# Altium PCB PCB_HVKQ_Mr_Thang.PcbDoc
Units mil, origin at the board's own origin, x right, y up, seen from the top; angles counter-clockwise.
Board outline 4724.94 x 6895.64 mil, 2 copper layers (Top Layer, Bottom Layer); 87 components, 142 nets, 425 pads, 0 vias.
Unrouted connection lines stored in the file: 192.
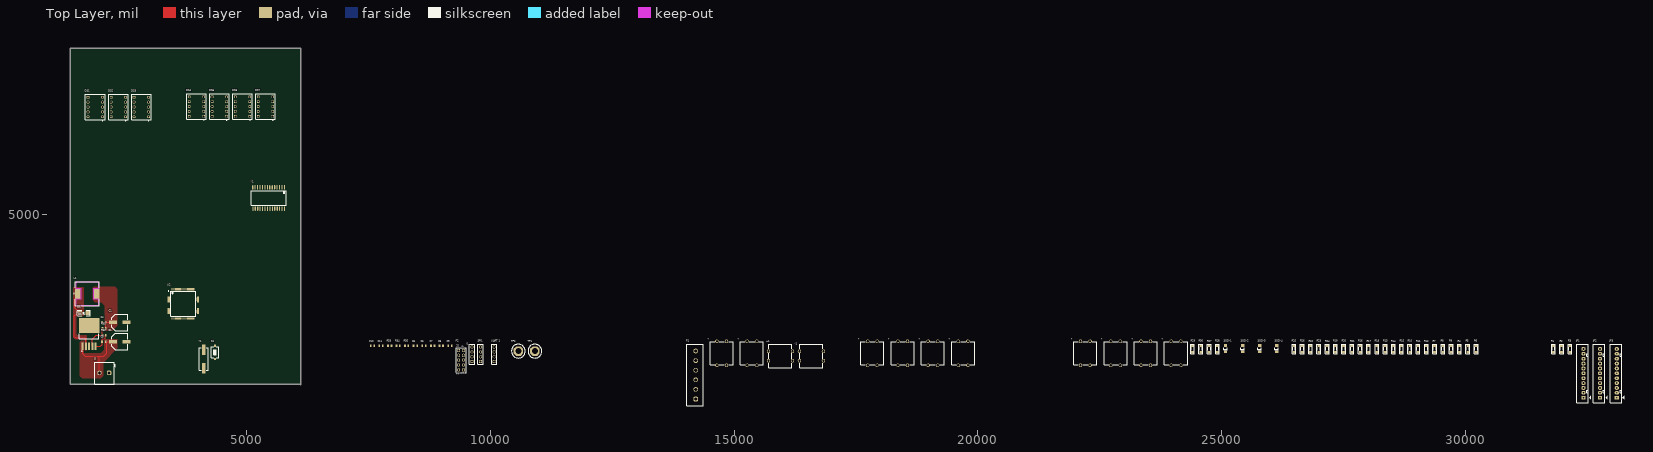
[diagram p0: Top Layer view]
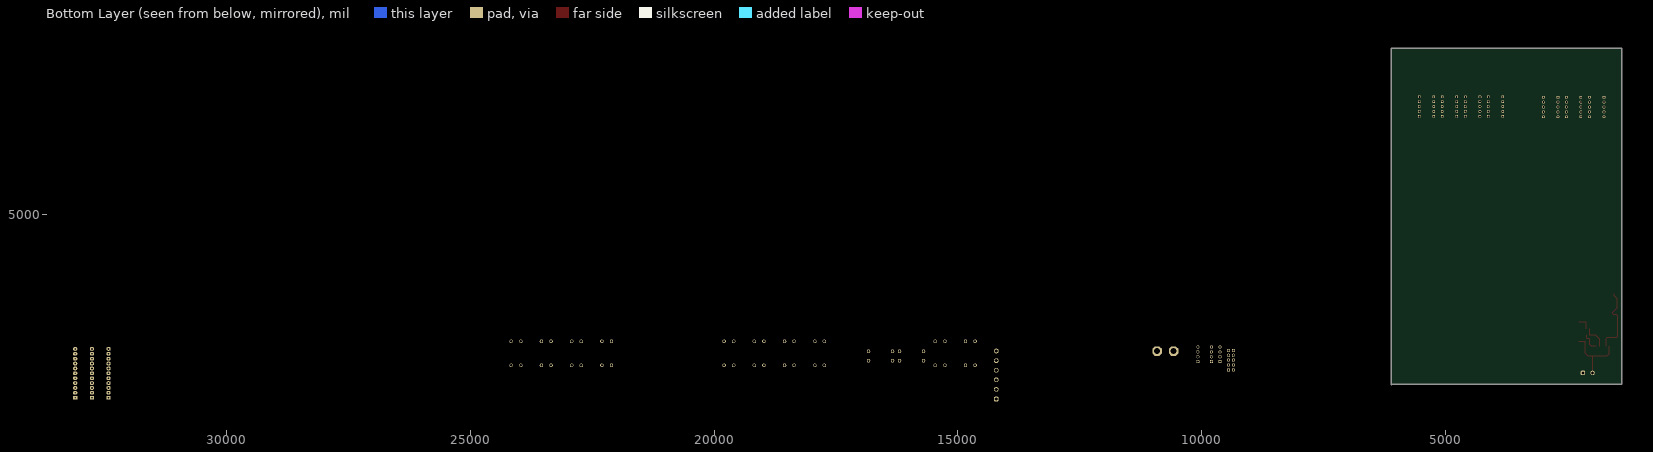
[diagram p1: Bottom Layer view, seen from below]

## Layer stack, top to bottom
Top Solder: solder mask 0.4, Solder Resist, Dk 3.5
Top Layer: signal copper 1.4
Dielectric 1: dielectric 12.6, FR-4, Dk 4.8
Bottom Layer: signal copper 1.4
Bottom Solder: solder mask 0.4, Solder Resist, Dk 3.5

## Board outline
1387.41,1515.08 1387.15,8405.11 6111.82,8405.37 6112.09,1515.36 6112.09,1510 cw(c6111.82,1510) 6111.56,1510 6111.56,1515.08

## Design rules (kind name [scope] priority, off if disabled: settings)
Clearance [All] p1: gap=10 ignorepadtopadclearanceinfootprint=FALSE except(0: Arc-Hole Track-Hole SMDPad-Hole THPad-Hole Via-Hole Fill-Hole Poly-Hole Region-Hole Text-Hole)
PlaneConnect [All] p1: planeconnectstyle=Direct reliefexpansion=20 reliefentries=4 reliefconductorwidth=10 reliefairgap=10
PolygonConnect [All] p1: connectstyle=Direct reliefconductorwidth=10 reliefentries=4 polygonreliefangle="90 Angle" airgapwidth=10
RoutingVias [All] p1: holewidth=28 width=50 viastyle="Through Hole" minholewidth=12 minwidth=24 maxholewidth=12 maxwidth=24
SolderMaskExpansion [All] p1: expansion=4 istentingtop=FALSE
Width [All] p1: maxlimit=50 minlimit=20 preferedwidth=30
29 further rules are at their usual default settings.

## Classes and differential pairs
component class SCH_HVKQ_Mr_THANG: *1 +1 -1 ? C1 C4 C5 C6 C7 C8 C9 C10 C11 D1 DS1 DS2 DS3 DS4 DS5 DS6 DS7 I1 J1 JP1 JP2 JP3 L1 P1 P2 R1 R2 R3 R4 R5 R6 R7 R8 R9 R10 R11 R12 R13 R14 R15 R16 R17 R18 R19 R20 R21 R22 R23 R24 R25 R26 R27 R28 R29 R30 R31 R32 R33 R34 R35 S1 SOD-1 SOD-2 SOD-3 SOD-4 SPI1 TP1 TP2 U1 U2 "UART 1" Y1

## Components (designator, comment, footprint, x,y, rotation, side; value= is the part's Value field where it differs from the comment)
*1 "TM1638" SOIC28 5455,5335 r270 top
+1 "430456073736" 4304x60737x6 15950,2095 r0 top
-1 "430456073736" 4304x60737x6 16585,2095 r0 top
? "430456073736" 4304x60737x6 19075,2150 r90 top
? "430456073736" 4304x60737x6 24060,2150 r90 top
? "430456073736" 4304x60737x6 17835,2150 r90 top
? "430456073736" 4304x60737x6 19695,2150 r90 top
? "430456073736" 4304x60737x6 23440,2150 r90 top
? "430456073736" 4304x60737x6 18455,2150 r90 top
? "430456073736" 4304x60737x6 15365,2150 r90 top
? "430456073736" 4304x60737x6 22820,2150 r90 top
? "430456073736" 4304x60737x6 22200,2150 r90 top
? "430456073736" 4304x60737x6 14745,2150 r90 top
C1 "6.8uF, 100V" WCAP-PSHP_D8H8.7 2402.8,2390 r180 top
C2 "6.8uF, 100V" WCAP-PSHP_D8H8.7 2402.8,2785 r180 top
C3 "10uF, 6.3V" WCAP-CSGP_0805_L2W1.25H1.25 2077.05,2390 r0 top
C4 "10uF, 6.3V" WCAP-CSGP_0805_L2W1.25H1.25 2077.05,2790 r0 top
C5 "10uF, 6.3V" WCAP-CSGP_0805_L2W1.25H1.25 8465,2305 r0 top
C6 "10uF, 6.3V" WCAP-CSGP_0805_L2W1.25H1.25 8640,2305 r0 top
C7 "10uF, 6.3V" WCAP-CSGP_0805_L2W1.25H1.25 8820,2305 r0 top
C8 "10uF, 6.3V" WCAP-CSGP_0805_L2W1.25H1.25 8995,2305 r0 top
C9 "10uF, 6.3V" WCAP-CSGP_0805_L2W1.25H1.25 9175,2305 r0 top
C10 "10uF, 6.3V" WCAP-CSGP_0805_L2W1.25H1.25 7585,2305 r0 top
C11 "10uF, 6.3V" WCAP-CSGP_0805_L2W1.25H1.25 7760,2305 r0 top
D1 "SS34" DIO-SMD-106 1665,2980 r0 top value=1N5007
DS1 "157119S12701" WL-T7DS_L13W10H7 1900,7200 r0 top
DS2 "157119S12701" WL-T7DS_L13W10H7 2375,7200 r0 top
DS3 "157119S12701" WL-T7DS_L13W10H7 2845,7200 r0 top
DS4 "157119S12701" WL-T7DS_L13W10H7 3975,7210 r0 top
DS5 "157119S12701" WL-T7DS_L13W10H7 4445,7210 r0 top
DS6 "157119S12701" WL-T7DS_L13W10H7 4920,7210 r0 top
DS7 "157119S12701" WL-T7DS_L13W10H7 5390,7210 r0 top
I1 "61300411121" 61300411121 9625,2130 r90 top
J1 "691236510002" 691236510002 2085,1742.46 r180 top
JP1 "JP11" Header11 32415,1240 r90 top value="Connector 11"
JP2 "JP11" Header11 32755,1240 r90 top value="Connector 11"
JP3 "JP11" Header11 33100,1240 r90 top value="Connector 11"
L1 "470µH, 0.97A" "WE-PD HV_1210" 1735.12,3375 r270 top
P1 "691311700106" 691311700106 14195,1705 r90 top
P2 "61301021121" 61301021121 9400,2010 r90 top
R1 "2k2" RES-SMD-1206 31800,2240 r90 top
R2 "2k2" RES-SMD-1206 31970,2240 r90 top
R3 "2k2" RES-SMD-1206 32140,2240 r90 top
R4 "2k2" RES-SMD-1206 29875,2240 r90 top
R5 "2k2" RES-SMD-1206 30045,2240 r90 top
R6 "2k2" RES-SMD-1206 30215,2240 r90 top
R7 "2k2" RES-SMD-1206 29365,2240 r90 top
R8 "2k2" RES-SMD-1206 29535,2240 r90 top
R9 "2k2" RES-SMD-1206 29705,2240 r90 top
R10 "2k2" RES-SMD-1206 28855,2240 r90 top
R11 "2k2" RES-SMD-1206 29025,2240 r90 top
R12 "2k2" RES-SMD-1206 29195,2240 r90 top
R13 "2k2" RES-SMD-1206 28350,2240 r90 top
R14 "2k2" RES-SMD-1206 28520,2240 r90 top
R15 "2k2" RES-SMD-1206 28685,2240 r90 top
R16 "2k2" RES-SMD-1206 27840,2240 r90 top
R17 "2k2" RES-SMD-1206 28010,2240 r90 top
R18 "2k2" RES-SMD-1206 28180,2240 r90 top
R19 "2k2" RES-SMD-1206 27330,2240 r90 top
R20 "2k2" RES-SMD-1206 27500,2240 r90 top
R21 "2k2" RES-SMD-1206 27670,2240 r90 top
R22 "2k2" RES-SMD-1206 26820,2240 r90 top
R23 "2k2" RES-SMD-1206 26990,2240 r90 top
R24 "2k2" RES-SMD-1206 27160,2240 r90 top
R25 "2k2" RES-SMD-1206 26480,2240 r90 top
R26 "2k2" RES-SMD-1206 26650,2240 r90 top
R27 "2k2" RES-SMD-1206 24740,2240 r90 top
R28 "2k2" RES-SMD-1206 24910,2240 r90 top
R29 "2k2" RES-SMD-1206 24400,2240 r90 top
R30 "2k2" RES-SMD-1206 24570,2240 r90 top
R31 "ADJ" WRIS-PSMB_0805_H0.35 2080,2657.85 r0 top
R32 "ADJ" WRIS-PSMB_0805_H0.35 2080,2524.51 r180 top
R33 "10k" WRIS-PSMB_0805_H0.35 7940,2305 r0 top
R34 "10k" WRIS-PSMB_0805_H0.35 8110,2305 r0 top
R35 "10k" WRIS-PSMB_0805_H0.35 8285,2305 r0 top
S1 "SW-SMD" SW-SMD 4355,2170 r90 top
SOD-1 "D" SOD-80 25075,2245 r90 top
SOD-2 "D" SOD-80 25425,2245 r90 top
SOD-3 "D" SOD-80 25775,2245 r90 top
SOD-4 "D" SOD-80 26125,2245 r90 top
SPI1 "61300411121" 61300411121 9800,2130 r90 top
TP1 "TP" TP 10915,2195 r0 top
TP2 "TP" TP 10575,2195 r0 top
U1 "LM2596" LM2596 1775,2548.37 r90 top
U2 "ATmega2560-AU" TQFP100L 3705,3165 r0 top
"UART 1" "61300411121" 61300411121 10080,2130 r90 top
Y1 "16MHz" WE-XTAL_HC49/4HSMX 4125,2035 r90 top

## Footprints (in the part's own frame and the unit in brackets; to place one, negate y for a bottom-side part, rotate by r counter-clockwise, add the part's x,y. Pads: shape width x height; smd on the part's side, far side on the other; paste and mask are expansions set on the pad)
4304x60737x6 [mm] "12x12mm washable Tact Switch, THT version"
  round 1.8 hole 1.2: 1(-6.25,2.5) 2(6.25,2.5) 3(-6.25,-2.5) 4(6.25,-2.5)
  silkscreen extent -6,-6 6,6, body extent -6.99,-6 6.99,6, height 7.35
61300411121 [mm] "Pin Header, pitch 2.54 mm, THT, Vertical, single row, 4p"
  rrect50% 1.6x1.6 hole 1.1: 1(-3.81,0)
  round 1.6 hole 1.1: 2(-1.27,0) 3(1.27,0) 4(3.81,0)
  silkscreen extent -5.23,-1.35 5.23,1.35, body extent -5.08,-1.27 5.08,1.27, height 8.57
61301021121 [mm] "Pin Header, pitch 2.54 mm, THT, Vertical, dual row, 10p"
  rrect50% 1.65x1.65 hole 1.1: 1(-5.08,-1.27)
  round 1.65 hole 1.1: 2(-5.08,1.27) 3(-2.54,-1.27) 4(-2.54,1.27) 5(0,-1.27) 6(0,1.27) 7(2.54,-1.27) 8(2.54,1.27) 9(5.08,-1.27) 10(5.08,1.27)
  silkscreen extent -6.5,-2.62 6.5,2.62, body extent -6.35,-2.54 6.35,2.54, height 8.59
691236510002 [mm] "Horizontal Cable Entry with Rising Cage Clamp, pitch 5.08mm, 02p"
  rrect50% 2.25x2.25 hole 1.5: 1(-2.54,-0.175)
  round 2.25 hole 1.5: 2(2.54,-0.175)
  silkscreen extent -5.68,-5.68 5.08,5.68, body extent -5.68,-5.67 5.08,5.68, height 18.1
691311700106 [mm] "5.00mm - PCB Vertical Closed - 06p"
  rrect50% 2.4x2.4 hole 1.6: 1(-12.5,-0.45)
  round 2.4 hole 1.6: 2(-7.5,-0.45) 3(-2.5,-0.45) 4(2.5,-0.45) 5(7.5,-0.45) 6(12.5,-0.45)
  silkscreen extent -16,-4.25 16,4.25, body extent -16,-4.25 16,4.25, height 12.1
DIO-SMD-106 [mil]
  rect 90x90.55 smd: 1(80,0) 2(-80,0)
  silkscreen extent -130,-55 135,55, body extent -99,-50 106,52, height 95
Header11 [mil] "CON11"
  rect 75x90 hole 34: 1(0,0)
  oval 75x90 hole 34: 2(100,0) 3(200,0) 4(300,0) 5(400,0) 6(500,0) 7(600,0) 8(700,0) 9(800,0) 10(900,0) 11(1000,0)
  silkscreen extent -100,-150 1100,140
LM2596 [mm] "Power"
  rect 3.79x0.99 smd: 1(-6.4,3.4) 2(-6.4,1.7) 3(-6.4,0) 4(-6.4,-1.7) 5(-6.4,-3.4)
  rect 7.88x10.84 smd paste-6: 6(4.35,0)
  silkscreen extent -9.1,-5.08 0.09,5.08, body extent -7.7,-5.21 6.69,5.2, height 0.15
RES-SMD-1206 [mil]
  rect 50x65 smd: 1(-65,0) 2(65,0)
  silkscreen extent -99,-38 99,39, body extent -63,-31 63,32, height 40
SOD-80 [mm] "SOD-80"
  rect 1.35x1.8 smd: 1(1.675,0) 2(-1.675,0)
  silkscreen extent -0.6,-0.9 0.6,0.9, body extent -1.75,-0.76 1.75,0.74, height 1.45
SOIC28 [mm]
  oval 2.25x0.6 smd: 1(-5.55,8.225) 2(-5.55,6.955) 3(-5.55,5.685) 4(-5.55,4.415) 5(-5.55,3.145) 6(-5.55,1.875) 7(-5.55,0.605) 8(-5.55,-0.665) 9(-5.55,-1.935) 10(-5.55,-3.205) 11(-5.55,-4.475) 12(-5.55,-5.745) 13(-5.55,-7.015) 14(-5.55,-8.285) 15(5.55,-8.225) 16(5.55,-6.955) 17(5.55,-5.685) 18(5.55,-4.415) 19(5.55,-3.145) 20(5.55,-1.875) 21(5.55,-0.605) 22(5.55,0.665) 23(5.55,1.935) 24(5.55,3.205) 25(5.55,4.475) 26(5.55,5.745) 27(5.55,7.015) 28(5.55,8.285)
  silkscreen extent -3.85,-9.1 3.85,9.1, body extent -5.08,-9.05 5.08,9.03, height 2
SW-SMD [mm] "Switch SMD type"
  rect 1.2x0.8 smd: 1(-3.5,0) 2(3.5,0)
  silkscreen extent -2.82,-1.85 2.82,1.85, body extent -3.05,-1.85 3.05,1.85, height 2.5
TP [mm] "TestPoint"
  oct 5x5 hole 3.1: 1(0,0)
  silkscreen extent -3.58,-3.59 3.59,3.59
TQFP100L [mm] "TQFP, 100-Leads, Body 14.00x14.00mm, Pitch 0.50mm, IPC High Density"
  oval 1.2x0.25 smd: 1(-7.6,6) 2(-7.6,5.5) 3(-7.6,5) 4(-7.6,4.5) 5(-7.6,4) 6(-7.6,3.5) 7(-7.6,3) 8(-7.6,2.5) 9(-7.6,2) 10(-7.6,1.5) 11(-7.6,1) 12(-7.6,0.5) 13(-7.6,0) 14(-7.6,-0.5) 15(-7.6,-1) 16(-7.6,-1.5) 17(-7.6,-2) 18(-7.6,-2.5) 19(-7.6,-3) 20(-7.6,-3.5) 21(-7.6,-4) 22(-7.6,-4.5) 23(-7.6,-5) 24(-7.6,-5.5) 25(-7.6,-6) 51(7.6,-6) 52(7.6,-5.5) 53(7.6,-5) 54(7.6,-4.5) 55(7.6,-4) 56(7.6,-3.5) 57(7.6,-3) 58(7.6,-2.5) 59(7.6,-2) 60(7.6,-1.5) 61(7.6,-1) 62(7.6,-0.5) 63(7.6,0) 64(7.6,0.5) 65(7.6,1) 66(7.6,1.5) 67(7.6,2) 68(7.6,2.5) 69(7.6,3) 70(7.6,3.5) 71(7.6,4) 72(7.6,4.5) 73(7.6,5) 74(7.6,5.5) 75(7.6,6)
  oval 0.25x1.2 smd: 26(-6,-7.6) 27(-5.5,-7.6) 28(-5,-7.6) 29(-4.5,-7.6) 30(-4,-7.6) 31(-3.5,-7.6) 32(-3,-7.6) 33(-2.5,-7.6) 34(-2,-7.6) 35(-1.5,-7.6) 36(-1,-7.6) 37(-0.5,-7.6) 38(0,-7.6) 39(0.5,-7.6) 40(1,-7.6) 41(1.5,-7.6) 42(2,-7.6) 43(2.5,-7.6) 44(3,-7.6) 45(3.5,-7.6) 46(4,-7.6) 47(4.5,-7.6) 48(5,-7.6) 49(5.5,-7.6) 50(6,-7.6) 76(6,7.6) 77(5.5,7.6) 78(5,7.6) 79(4.5,7.6) 80(4,7.6) 81(3.5,7.6) 82(3,7.6) 83(2.5,7.6) 84(2,7.6) 85(1.5,7.6) 86(1,7.6) 87(0.5,7.6) 88(0,7.6) 89(-0.5,7.6) 90(-1,7.6) 91(-1.5,7.6) 92(-2,7.6) 93(-2.5,7.6) 94(-3,7.6) 95(-3.5,7.6) 96(-4,7.6) 97(-4.5,7.6) 98(-5,7.6) 99(-5.5,7.6) 100(-6,7.6)
  silkscreen extent -7.72,-6.6 6.6,6.8, body extent -8,-8 8,8, height 1.2
WCAP-CSGP_0805_L2W1.25H1.25 [mm] "Ceramic Capacitors, body 2x1.25mm"
  rect 0.9x1.3 smd: 1(-0.95,0) 2(0.95,0)
  body extent -1,-0.63 1,0.63, height 1.25
WCAP-PSHP_D8H8.7 [mm] "Aluminium Polymer V-Chip SMT Capacitors, D8mm x L8.7mm"
  rect 4.2x1.9 smd: 1(3.5,0) 2(-3.5,0)
  silkscreen extent -4.25,-4.25 4.25,4.25, body extent -4.5,-4.15 4.5,4.15, height 8.7
"WE-PD HV_1210" [mm] "SMT High Voltage Power Inductor, 2-Leads, body 12.00x12.00mm"
  rect 5.4x2.9 smd: 1(0,-4.95) 2(0,4.95)
  Top Layer keep-out region: -6,6 -6,-6 -2.9,-6 -2.9,-3.3 2.9,-3.3 2.9,-6 6,-6 6,6 2.9,6 2.9,3.3 -2.9,3.3 -2.9,6
  silkscreen extent -6.25,-7.02 6.25,6.25, body extent -6,-6 6,6, height 9.7
WE-XTAL_HC49/4HSMX [mm] "Quartz Crystal, size HC49/4HSMX, body 11.4x4.9mm"
  rect 5.5x2 smd: 1(-4.75,0) 2(4.75,0)
  silkscreen extent -5.8,-2.45 5.8,2.45, body extent -6.7,-2.45 6.7,2.45, height 4.3
WL-T7DS_L13W10H7 [mm] "7 Segments Display THT Single Digit , body 10x13mm"
  rrect50% 1.5x1.5 hole 1: 1(-3.76,5.08)
  round 1.5 hole 1: 2(-3.76,2.54) 3(-3.76,0) 4(-3.76,-2.54) 5(-3.76,-5.08) 6(3.76,-5.08) 7(3.76,-2.54) 8(3.76,0) 9(3.76,2.54) 10(3.76,5.08)
  silkscreen extent -5.12,-7.22 5.13,6.63, body extent -5,-6.5 5,6.5, height 7.1
WRIS-PSMB_0805_H0.35 [mm] "Metal Plate Resistor, SMT, body size 2x1.25mm"
  rect 0.95x1.36 smd: 1(-0.875,0) 2(0.875,0)
  body extent -1,-0.62 1,0.63, height 0.35

## Part data
+1 -1 ? ? ? ? ? ? ? ? ? ?: "WS-TATV THT Washable Tact Switch 12x12mm, height 7.3mm, 360gf", Operating Temperature="-40 to +85degC", Rated Current=50mA, Rated Voltage=12VDC, ComponentLink1Description=Manufacturer, ComponentLink1URL=http://www.we-online.de, ComponentLink2Description=Datasheet, ComponentLink2URL=https://katalog.we-online.com/em/datasheet/430456073736.pdf, Contact Material="Stainless Steel", Contact Plating=Silver, Height=7.3mm, Mounting Technology=THT, Operation Force=360gf, Packaging=Bulk, Part Number=430456073736, Published Date="September 2019", Publisher="Wurth Elektronik", Terminal Material="Copper Alloy", Terminal Plating=Silver, Washable=Yes
C1 C2: library part 875115952001, "WCAP-PSHP Aluminum Polymer Capacitor, V-Chip, SMT, D8xH8.7mm, 6.8uF, 100V", Capacitance=6.8uF, Capacitance Tolerance=+/-20%, Leakage Current=136uA, Manufacturer="Wurth Elektronik", Operating Temperature="-55 to +105degC", Rated Voltage=100VDC, Ripple Current=1500mA, ComponentLink1Description=Manufacturer, ComponentLink1URL=http://www.we-online.de, ComponentLink2Description=Datasheet, ComponentLink2URL=https://www.we-online.com/catalog/datasheet/875115952001.pdf, Diameter=8mm, Dissipation Factor=12%, Endurance=2000h, ESR=48mOhm, Height=8.7mm, Manufacturer Part Number=875115952001, Mounting Technology=SMT, Packaging="Tape and Reel", Published Date="October 2020", Technical Reference=PSEE0876R8M100DVCTEB000
C3 C4 C5 C6 C7 C8 C9 C10 C11: library part 885012107004, "WCAP-CSGP Multilayer Ceramic Chip Capacitor, General Purpose, size 0805, X5R, 10uF, 6.3V", Capacitance=10uF, Capacitance Tolerance=+/-20%, Isolation Resistance=0.01GOhm, Manufacturer="Wurth Elektronik", Operating Temperature max.=85C, Operating Temperature min.=-55C, Rated Voltage=6.3V, Ceramic Type=X5R, ComponentLink1Description="Manufacturer Link", ComponentLink1URL=http://www.we-online.de, ComponentLink2Description=Datasheet, ComponentLink2URL=https://www.we-online.com/catalog/datasheet/885012107004.pdf, Dissipation Factor=15%, Height=1.25mm, Length=2mm, Manufacturer Part Number=885012107004, Mounting Technology=SMT, Packaging="Tape and Reel", Size=0805, Technical Reference=X5R0805106M6R3DFCT10000, Width=1.25mm
D1: library part "Diode SMD", "Default Diode", Code - JEDEC=DO-214-AB, Published=8-Jun-2000, Publisher="Altium Limited", Revision="July-2002: Re-released for DXP Platform."
DS1 DS2 DS3 DS4 DS5 DS6 DS7: "WL-T7DS 7 Segments Display THT Single Digit, Common Cathode, 0.39\"/ 9.9mm, 38mcd, 2V, Super Red", Emitting Color="Super Red", Forward Voltage=2V, Manufacturer="Wurth Elektronik", Operating Temperature max.=85C, Operating Temperature min.=-40C, Circuitry="Common Cathode", ComponentLink1Description="Manufacturer Link", ComponentLink1URL=http://www.we-online.de, ComponentLink2Description=Datasheet, ComponentLink2URL=https://www.we-online.com/catalog/datasheet/157119S12701.pdf, Display Height="0.39\"/ 9.9mm", Height=7mm, Length=13mm, Luminous Intensity=38mcd, Manufacturer Part Number=157119S12701, Mounting Technology=THT, Packaging=Tube, Width=10mm
I1 SPI1 "UART 1": "WR-PHD Pin Header, THT, pitch 2.54mm, Single Row, Vertical, 4p", Contact Resistance=20mOhm, Manufacturer="Wurth Elektronik", Operating Temperature="-40 to +105degC", Rated Current=3A, Withstanding Voltage=500VAC, Working Voltage=250VAC, ComponentLink1Description=Manufacturer, ComponentLink1URL=http://www.we-online.de, ComponentLink2Description=Datasheet, ComponentLink2URL=https://www.we-online.com/catalog/datasheet/61300411121.pdf, Gender="Pin Header", Manufacturer Part Number=61300411121, Mounting Technology=THT, Orientation=Vertical, Packaging=Bag, Pin Number=4, Pitch=2.54mm, Row Number=Single
J1: "WR-TBL Serie 2365 Horizontal Entry, Rising Cage Clamp, THT, pitch 5.08mm, 2p", Manufacturer="Wurth Elektronik", Operating Temperature="-30 to +120degC", Rated Current [UL]=20A, Working Voltage [UL]=300VAC, Application="Rising Cage Clamp", ComponentLink1Description=Manufacturer, ComponentLink1URL=http://www.we-online.de, ComponentLink2Description=Datasheet, ComponentLink2URL=https://katalog.we-online.de/em/datasheet/691236510002.pdf, Manufacturer Part Number=691236510002, Modularity=Yes, Mounting Technology=THT, Packaging=Box, PCB/Cable/Panel=PCB, Pin Number=2, Pitch=5.08mm, Published Date="Feburary 2021", Type=Horizontal
JP1 JP2 JP3: library part Header11, "Connector 11"
L1: library part 7687709471, "WE-PD HV SMT High Voltage Power Inductor, size 1210, 470µH, 0.97A, 0.8Ω", Case/Size Code=1210, DC Resistance=0.68Ω, DC Resistance Max=0.8Ω, Inductance=470µH, Manufacturer="Wurth Elektronik", Operating Temperature Max=125°C, Operating Temperature Min=-40°C, Operating Voltage (DC)=400V, Rated Current=0.97A, Saturation Current=1.4A, Self Resonant Frequency=1.9MHz, Category="High Voltage Power Inductors", ComponentLink1Description="Website Link", ComponentLink1URL=https://www.we-online.com/redexpert/article/7687709471?ad, ComponentLink2Description="Datasheet Link", ComponentLink2URL=https://www.we-online.com/redexpert/spec/7687709471?ad, Height=10.5mm, Length=12mm, Manufacturer Part Number=7687709471, Match Code="WE-PD HV", Mount="Surface Mount", Packaging="Tape and Reel", Width=12mm
P1: "WR-TBL Serie 3117 Close Vertical PCB Header, Pluggable, THT, pitch 5mm, 6p", Manufacturer="Wurth Elektronik", Operating Temperature="-40 to +105degC", Rated Current [UL]=20A, Working Voltage [UL]=300VAC, Application=Pluggable, ComponentLink1Description=Manufacturer, ComponentLink1URL=http://www.we-online.de, ComponentLink2Description=Datasheet, ComponentLink2URL=https://katalog.we-online.de/em/datasheet/691311700106.pdf, Manufacturer Part Number=691311700106, Modularity=No, Mounting Technology=THT, Packaging=Box, PCB/Cable/Panel=PCB, Pin Number=6, Pitch=5mm, Published Date="Feburary 2021", Type=Vertical
P2: "WR-PHD Pin Header, THT, pitch 2.54mm, Dual Row, Vertical, 10p", Contact Resistance=20mOhm, Manufacturer="Wurth Elektronik", Operating Temperature="-40 to +105degC", Rated Current=3A, Withstanding Voltage=500VAC, Working Voltage=250VAC, ComponentLink1Description=Manufacturer, ComponentLink1URL=http://www.we-online.de, ComponentLink2Description=Datasheet, ComponentLink2URL=https://www.we-online.com/catalog/datasheet/61301021121.pdf, Gender="Pin Header", Manufacturer Part Number=61301021121, Mounting Technology=THT, Orientation=Vertical, Packaging=Bag, Pin Number=10, Pitch=2.54mm, Row Number=Dual
R1 R2 R3 R4 R5 R6 R7 R8 R9 R10 R11 R12 R13 R14 R15 R16 R17 R18 R19 R20 R21 R22 R23 R24 R25 R26 R27 R28 R29 R30: library part Res-SMD, "Resistor", Manufacturer="Generic Components", Class=Passive, Published=08/06/2000, Publisher="Altium Hobart Technology Centre"
R31 R32 R33 R34 R35: library part 580060720003, "WRIS-PSMB SMT Metal Plate Resistor, size 0805, 5mOhm, 0.5W", Manufacturer="Wurth Elektronik", Operating Temperature="-55 to +155degC", Rated Current=10A, Rated Power=0.5W, Resistance=5mOhm, Resistance Tolerance=+/-1%, Temperature Coefficient of Resistance=+/-100ppm/degC, ComponentLink1Description=Manufacturer, ComponentLink1URL=http://www.we-online.de, ComponentLink2Description=Datasheet, ComponentLink2URL=https://www.we-online.com/catalog/datasheet/580060720003.pdf, Height=0.35mm, Length=2mm, Manufacturer Part Number=580060720003, Mounting Technology=SMT, Packaging="Tape and Reel", Published Date="May 2020", Size=0805, Technical Reference=MB0805R005F102KAATP0000, Width=1.25mm
S1: "Switch", LatestRevisionDate=17-Jul-2002, LatestRevisionNote="Re-released for DXP Platform.", PackageReference=SPST-2, Published=24-Mar-1999, Publisher="Altium Limited"
SOD-1 SOD-2 SOD-3 SOD-4: library part 1N4148
TP1 TP2: library part "TEST POINT", "Test point"
U2: "8-bit AVR Microcontroller, 4.5-5.5V, 256KB Flash, 4KB EEPROM, 8KB SRAM, 86 GPIO pins, 100-pin TQFP, Industrial Grade (-40°C to 85°C), Pb-Free", Supplier Part Number 1=ATMEGA2560-16AUR-ND, Supplier 1=Digi-Key
Y1: library part 830003237, "WE-XTAL Quartz Crystal, SMT, HC49/4HSMX, 16MHz, +/-30ppm", Frequency Stability=+/-50ppm, Frequency Tolerance=+/-30ppm, Load Capacitance=16pF, Manufacturer="Wurth Elektronik", Operating Temperature="-10 to +60degC", ComponentLink1Description=Manufacturer, ComponentLink1URL=http://www.we-online.de, ComponentLink2Description=Datasheet, ComponentLink2URL=https://katalog.we-online.com/pbs/datasheet/830003237.pdf, Frequency=16MHz, Manufacturer Part Number=830003237, Mounting Technology=SMT, Packaging="Tape and Reel", Published Date="July 2020", Size=HC49/4HSMX

## Nets (pads, with @x,y where several pads share a name; then routed paths per layer and width w, separated by ;. In a path a pad name is that pad's centre, name@x,y a point inside that pad or via, vN(x,y) a via of type N, cw(c..) or ccw(c..) an arc to the next point about the centre after c; other vN are vias at no path point)
5v: "UART 1.1" *1.4 *1.15 C2.1 C4.2 C5.2 C6.2 C7.2 C8.2 C9.2 I1.1 L1.2 P2.1 R31.2 R33.2 R34.2 R35.2 U2.10 U2.31 U2.61 U2.80 U2.98 | length 284.8
  Top Layer w20: R31.2 C4.2 2260,2790 C2.1
27V: C1.1 C3.2 J1.2 U1.1 | length 1407.1
  Top Layer w20: U1.1 1641.14,2138.86 1690,2090 1985,2090 ; J1.2 1985,2090 ; C1.1 2135,2390 2135,2150 2075,2090 1985,2090
ADC_SS: U2.9
BACKUP: R30.2
C0: R4.2
C1: R7.2
C2: R10.2
C3: R13.2
C4: R16.2
C5: R19.2
C6: R22.2
CLK_TM1638: *1.27 U2.88
DATA: U2.24
DIO_TM1638: *1.26 U2.89
Feedback_Power: R31.1 R32.2 U1.4 | length 518.5
  Top Layer w20: U1.4 1841.93,2436.93 1921.44,2516.44 2045.55,2516.44 R31.1
GND: "UART 1.4" *1.18 *1.25 C1.2 C2.2 C3.1 C4.1 C5.1 C6.1 C7.1 C8.1 C9.1 C10.2 C11.2 D1.1 I1.4 J1.1 P2.3 R32.1 S1.1 U1.3 U1.5 U1.6 U2.11 U2.32 U2.62 U2.81 U2.99 | length 396.7
  Top Layer w20: U1.5 2006.4,2296.4 2039.65,2329.65 2039.65,2438.28 2051.36,2450 2096.32,2450 2108.03,2461.72 2108.03,2518.1 R32.1
GR1: *1.24 DS1.3 DS1.8
GR2: *1.23 DS2.3 DS2.8
GR3: *1.22 DS3.3 DS3.8
GR4: *1.21 DS4.3 DS4.8
GR5: *1.20 DS5.3 DS5.8
GR6: *1.19 DS6.3 DS6.8
GR7: *1.17 DS7.3 DS7.8
INDIK: R15.2
K1: *1.1 ?.3@22298.43,1903.94 ?.3@22918.43,1903.94 ?.3@23538.43,1903.94 ?.3@24158.43,1903.94 ?.4@22298.43,2396.06 ?.4@22918.43,2396.06 ?.4@23538.43,2396.06 ?.4@24158.43,2396.06 R18.2
K2: *1.2 ?.3@18553.43,1903.94 ?.3@19173.43,1903.94 ?.4@19173.43,2396.06 R21.2
K3: *1.3 ?.3@14843.43,1903.94 ?.3@15463.43,1903.94 ?.4@14843.43,2396.06 ?.4@15463.43,2396.06 R24.2
K4: R26.2
KPU: R9.2
KSHVM: R6.2
LAN_INT: P2.9
LAN_RST: P2.10
lAN_SS: P2.2 SPI1.4 U2.19
LAT: U2.23
MCU_MISO: P2.8 SPI1.1 U2.22
MCU_MOSI: P2.6 SPI1.2 U2.21
MCU_RXD0: TP1.1 U2.2
MCU_RXD1: U2.45
MCU_RXD2: U2.12
MCU_RXD3: "UART 1.3" U2.63
MCU_SCK: P2.4 SPI1.3 U2.20
MCU_SCL: I1.3 R33.1 U2.43
MCU_SDA: I1.2 R34.1 U2.44
MCU_TXD0: TP2.1 U2.3
MCU_TXD1: U2.46
MCU_TXD2: U2.13
MCU_TXD3: "UART 1.2" U2.64
Net+1_2: +1.2 SOD-3.2
Net-1_1: -1.1 -1.2 SOD-4.2
Net?_1: ?.1@19596.57,1903.94 ?.2@19596.57,2396.06
NetC10_1: C10.1 U2.33 Y1.1
NetC11_1: C11.1 U2.34 Y1.2
NetD1_2: D1.2 L1.1 U1.2 | length 1447.9
  Top Layer w20: L1.1 1540.24,3327.91 1493.15,3280.83 1490.61,3280.83 1478.9,3269.11 1478.9,3086.38 1585,2980.28 D1.2 1585,2979.72 1550,2944.72 1491.44,2944.72 1470,2923.28 1470,2490 1485.03,2474.97 1495,2465 1696.36,2465 1708.07,2453.28 U1.2
NetJP1_1: JP1.1 R1.1
NetJP1_2: JP1.2 R4.1
NetJP1_3: JP1.3 R7.1
NetJP1_4: JP1.4 R10.1
NetJP1_5: JP1.5 R13.1
NetJP1_7: JP1.7 R19.1
NetJP1_8: JP1.8 R22.1
NetJP2_1: JP2.1 R2.1
NetJP2_2: JP2.2 R5.1
NetJP2_3: JP2.3 R8.1
NetJP2_4: JP2.4 R11.1
NetJP2_5: JP2.5 R14.1
NetJP2_6: JP2.6 R17.1
NetJP2_7: JP2.7 R20.1
NetJP2_8: JP2.8 R23.1
NetJP2_9: JP2.9 R25.1
NetJP2_10: JP2.10 R27.1
NetJP2_11: JP2.11 R29.1
NetJP3_1: JP3.1 R3.1
NetJP3_2: JP3.2 R6.1
NetJP3_3: JP3.3 R9.1
NetJP3_4: JP3.4 R12.1
NetJP3_5: JP3.5 R15.1
NetJP3_7: JP3.7 R21.1
NetJP3_8: JP3.8 R24.1
NetL2_1: U2.100
OTKL: R1.2 R2.2
OTKL_PU: R3.2
PA0: U2.78
PA1: U2.77
PA2: U2.76
PA3: U2.75
PA4: U2.74
PA5: U2.73
PA6: U2.72
PA7: U2.71
PC0: U2.53
PC1: U2.54
PC2: U2.55
PC3: U2.56
PC4: U2.57
PC5: U2.58
PC6: U2.59
PC7: U2.60
PF0: U2.97
PF1: U2.96
PF2: U2.95
PF3: U2.94
PF4: U2.93
PF5: U2.92
PF6: U2.91
PF7: U2.90
PL0: U2.35
PL1: U2.36
PL2: U2.37
PL3: U2.38
PL4: U2.39
PL5: U2.40
PL6: U2.41
PL7: U2.42
RABOTA: R28.2
RESET: P2.7 R35.1 S1.2 U2.30
SCK: U2.25
SET_1: U2.15
SET_2: U2.16
SET_3: U2.17 U2.27
SET_4: U2.18
SET_6: U2.26
SET_7: U2.1
SG1: *1.5 DS1.10 DS2.10 DS3.10 DS4.10 DS5.10 DS6.10 DS7.10 SOD-1.1
SG2: *1.6 DS1.9 DS2.9 DS3.9 DS4.9 DS5.9 DS6.9 DS7.9 SOD-2.1
SG3: *1.7 DS1.7 DS2.7 DS3.7 DS4.7 DS5.7 DS6.7 DS7.7 SOD-3.1
SG4: *1.8 DS1.5 DS2.5 DS3.5 DS4.5 DS5.5 DS6.5 DS7.5 SOD-4.1
SG5: *1.9 DS1.4 DS2.4 DS3.4 DS4.4 DS5.4 DS6.4 DS7.4
SG6: *1.10 DS1.2 DS2.2 DS3.2 DS4.2 DS5.2 DS6.2 DS7.2
SG7: *1.11 DS1.1 DS2.1 DS3.1 DS4.1 DS5.1 DS6.1 DS7.1
SG8: *1.12 DS1.6 DS2.6 DS3.6 DS4.6 DS5.6 DS6.6 DS7.6
STB_TM1638: *1.28 U2.87
TP1: R5.2
TP2: R8.2
TP3: R11.2
TP4: R14.2
TP5: R17.2
TP6: R20.2
TP7: R23.2
TP8: R25.2
TP9: R27.2
TP10: R29.2
VVOD: R12.2
pads on no net: *1.13 *1.14 *1.16 +1.1 +1.3 +1.4 -1.3 -1.4 ?.1@14646.57,1903.94 ?.1@15266.57,1903.94 ?.1@17736.57,1903.94 ?.1@18356.57,1903.94 ?.1@18976.57,1903.94 ?.1@22101.57,1903.94 ?.1@22721.57,1903.94 ?.1@23341.57,1903.94 ?.1@23961.57,1903.94 ?.2@14646.57,2396.06 ?.2@15266.57,2396.06 ?.2@17736.57,2396.06 ?.2@18356.57,2396.06 ?.2@18976.57,2396.06 ?.2@22101.57,2396.06 ?.2@22721.57,2396.06 ?.2@23341.57,2396.06 ?.2@23961.57,2396.06 ?.3@17933.43,1903.94 ?.3@19793.43,1903.94 ?.4@17933.43,2396.06 ?.4@18553.43,2396.06 ?.4@19793.43,2396.06 JP1.6 JP1.9 JP1.10 JP1.11 JP3.6 JP3.9 JP3.10 JP3.11 P1.1 P1.2 P1.3 P1.4 P1.5 P1.6 P2.5 R16.1 R18.1 R26.1 R28.1 R30.1 SOD-1.2 SOD-2.2 U2.4 U2.5 U2.6 U2.7 U2.8 U2.14 U2.28 U2.29 U2.47 U2.48 U2.49 U2.50 U2.51 U2.52 U2.65 U2.66 U2.67 U2.68 U2.69 U2.70 U2.79 U2.82 U2.83 U2.84 U2.85 U2.86

## Polygon pours and split planes (outlines as drawn)
27V on Top Layer "27V_L01_P002" (solid, pour order 2): 2060,1685 2010,1635 1630,1635 1585,1680 1585,2375 1615,2405 1660,2405 1665,2400 1665,2150 2015,2150 2085,2220 2085,2415 2105,2435 2355,2435 2355,2250 2060,1955
NetD1_2 on Top Layer "NETD1_2_L01_P001" (solid, pour order 1): 1445,3505 1650,3505 1665,3490 1665,2930 1640,2905 1515,2905 1515,2550 1540,2525 1730,2525 1730,2215 1680,2215 1680,2430 1675,2435 1480,2435 1445,2470
5v on Top Layer "5V_L01_P000" (solid, pour order 0): 2090,2620 2100,2610 2250,2610 2355,2715 2355,3465 2310,3510 1865,3510 1840,3485 1845,3480 1845,3245 1890,3200 2020,3200 2090,3130

## Silkscreen, mask and mechanical layers (free items; w line width, h text height)
Mechanical 1:
  lines w0.5: 6111.82,1510 6111.82,8405.11 1387.41,8405.11 1387.41,1515.34 6111.82,1515.34 ; 1623.63,6909.05 5875.6,6909.05 5875.6,7499.6 1623.63,7499.6 1623.63,6909.05

## Text inside footprints (layer, text, board x,y; h text height)
P2: Top Overlay "2" at 9364.57,1714.33 h40 r90; Top Overlay "1" at 9470.87,1726.14 h40 r90; Top Overlay "9" at 9470.87,2278.11 h40 r90; Top Overlay "10" at 9364.57,2278.11 h40 r90